# EAGLE board tappytap (EAGLE 7.3.0)
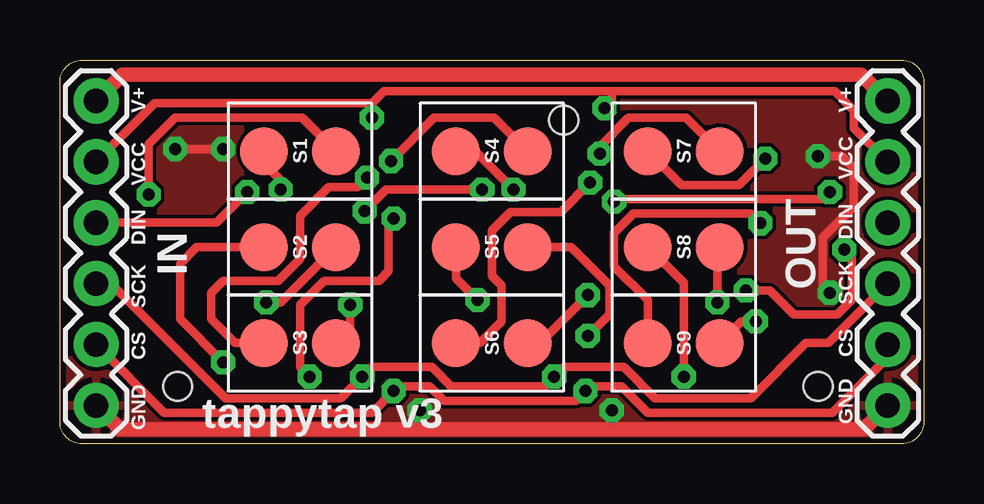
[diagram p0: board, top side]
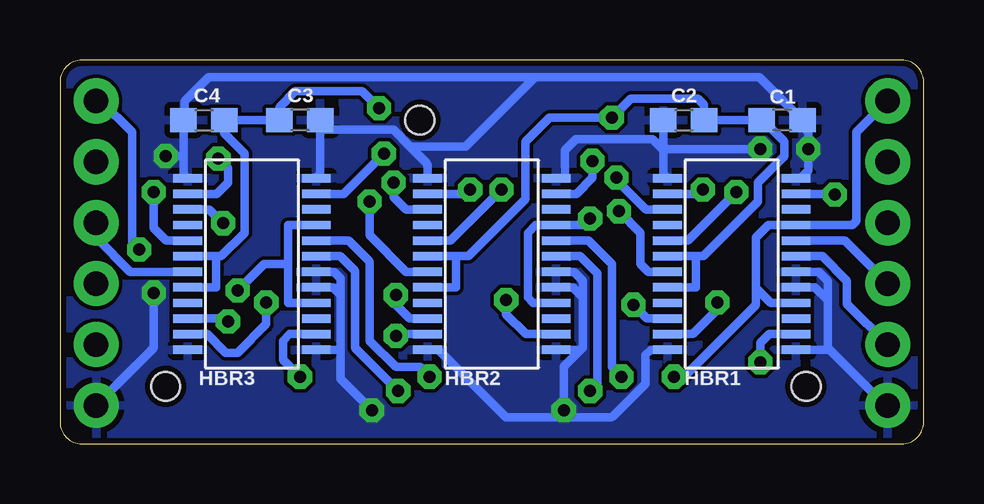
[diagram p1: board, bottom side, seen from below]

Size 36.01 x 16.01 mm. Coordinates in mm from the lower left corner, seen from the top.
Outline: 0,15 arc-100 1,16 35,16 arc-100 36,15 36,1 arc-100 35,0 1,0 arc-100 0,1 0,15
Copper layers (1*16): Top 0.035mm / dielectric 1.6mm / Bottom 0.035mm
Design rules "PCBWay": minimum track width 6mil, minimum drill 0.3mm, track to track 6mil, track to pad 6mil, pad to pad 6mil, via to via 6mil, smd to smd 6mil, copper to edge 10mil, drill to drill 8mil, minimum pad ring 12mil, minimum via ring 10mil, stop-mask expansion 4mil, vias tented up to drill 25mil, thermal gap 10mil
Holes 1.2 mm at 4.9,2.4 31.6,2.4 21,13.5

## Footprints (pad centres in the part's own frame; a part is rotated, then mirrored left to right if it is on the bottom)
C0603 = smd 1.1 x 1: 1 -0.85,0; 2 0.85,0
SSOP-24 = smd 1.2 x 0.35: 1 -2.68,3.575; 2 -2.68,2.925; 3 -2.68,2.275; 4 -2.68,1.625; 5 -2.68,0.975; 6 -2.68,0.325; 7 -2.68,-0.325; 8 -2.68,-0.975; 9 -2.68,-1.625; 10 -2.68,-2.275; 11 -2.68,-2.925; 12 -2.68,-3.575; 13 2.68,-3.575; 14 2.68,-2.925; 15 2.68,-2.275; 16 2.68,-1.625; 17 2.68,-0.975; 18 2.68,-0.325; 19 2.68,0.325; 20 2.68,0.975; 21 2.68,1.625; 22 2.68,2.275; 23 2.68,2.925; 24 2.68,3.575
1X06 = drill 1.016 pad 1.88: 1 0,0; 2 2.54,0; 3 5.08,0; 4 7.62,0; 5 10.16,0; 6 12.7,0
TP2_2MM = smd 2 x 2: P$1 -1.5,0; P$2 1.5,0

## Placement (x,y rotation side)
C1  10uF  [C0603]  5.9,13.5 0 bottom
C2  0.1uF  [C0603]  10,13.5 180 bottom
C3  10uF  [C0603]  26,13.5 0 bottom
C4  0.1uF  [C0603]  30,13.5 180 bottom
HBR1  NCV7718  [SSOP-24]  8,7.5 0 bottom
HBR2  NCV7718  [SSOP-24]  18,7.5 0 bottom
HBR3  NCV7718  [SSOP-24]  28,7.5 0 bottom
IN  [1X06]  1.5,1.6 90 top
OUT  [1X06]  34.5,1.6 90 top
S1  TP2  [TP2_2MM]  10,12.2 0 top
S2  TP2  [TP2_2MM]  10,8.2 0 top
S3  TP2  [TP2_2MM]  10,4.2 0 top
S4  TP2  [TP2_2MM]  18,12.2 0 top
S5  TP2  [TP2_2MM]  18,8.2 0 top
S6  TP2  [TP2_2MM]  18,4.2 0 top
S7  TP2  [TP2_2MM]  26,12.2 0 top
S8  TP2  [TP2_2MM]  26,8.2 0 top
S9  TP2  [TP2_2MM]  26,4.2 0 top

## Library data of the parts
C1-C4 = rcl
HBR1-HBR3 S1-S9 = Sparky
IN OUT = SparkFun-Connectors; PROD_ID: CONN-08437

## Nets
+5V [usbvcc]: C1.1 C2.1 C3.1 C4.1 HBR1.6 HBR1.8 HBR2.6 HBR2.8 HBR3.6 HBR3.8 IN.5 OUT.5
GND [gnd]: C1.2 C2.2 C3.2 C4.2 HBR1.1 HBR1.12 HBR1.13 HBR1.17 HBR1.18 HBR1.24 HBR2.1 HBR2.12 HBR2.13 HBR2.17 HBR2.18 HBR2.24 HBR3.1 HBR3.12 HBR3.13 HBR3.17 HBR3.18 HBR3.24 IN.1 OUT.1
N$24: HBR1.7 HBR2.5
N$26: HBR2.7 HBR3.5
NCV_CS: HBR1.19 HBR2.19 HBR3.19 IN.2 OUT.2
S1A: HBR1.2 S1.P$1
S1B: HBR1.23 S1.P$2
S2A: HBR1.14 S2.P$1
S2B: HBR1.11 S2.P$2
S3A: HBR1.3 S3.P$1
S3B: HBR1.10 S3.P$2
S4A: HBR2.2 S4.P$1
S4B: HBR2.23 S4.P$2
S5A: HBR2.14 S5.P$1
S5B: HBR2.11 S5.P$2
S6A: HBR2.3 S6.P$1
S6B: HBR2.10 S6.P$2
S7A: HBR3.2 S7.P$1
S7B: HBR3.23 S7.P$2
S8A: HBR3.14 S8.P$1
S8B: HBR3.11 S8.P$2
S9A: HBR3.3 S9.P$1
S9B: HBR3.10 S9.P$2
SCK: HBR1.20 HBR2.20 HBR3.20 IN.3 OUT.3
SI: HBR1.5 IN.4
SO: HBR3.7 OUT.4
V+: HBR1.16 HBR1.21 HBR2.16 HBR2.21 HBR3.16 HBR3.21 IN.6 OUT.6

## Tracks (layer width: path | path; a pad name or v marks a point on that pad's centre or on a via)
+5V  (via drill 0.5)
  Top 0.35: v13,13.6 13,14.2 | 13,14.2 3.94,14.2 IN.5 | OUT.5 33.1,13.16 33.1,13.9 32.3,14.7 23,14.7 | 13,14.2 13.5,14.7 23,14.7 | v22.7,14 23,14.3 23,14.7
  Bottom 0.35: 26.6,13.25 C3.1 | HBR1.6 9.5,7.83 | 9.5,7.83 9.18,7.83 6.9,10.1 6.9,10.9 5.8,12 5.8,12.6 6.65,13.45 6.7,13.45 C1.1 C2.1 9.15,14.15 9.4,14.4 12.2,14.4 v13,13.6 15.6,13.6 16.6,12.6 16.6,10.2 18.98,7.83 19.5,7.83 | HBR1.8 9.5,6.53 9.5,7.83 | HBR2.8 19.5,6.53 19.5,7.83 | 19.5,7.83 HBR2.6 | HBR3.6 29.5,7.83 | 29.5,7.83 29.5,6.53 HBR3.8 | 26.8,13.55 C3.1 | 29.5,7.83 29.28,7.83 28.3,8.8 28.3,12.1 29.15,12.95 C4.1 C3.1 | C3.1 26.85,14.05 26.2,14.7 23.4,14.7 v22.7,14
GND  (via drill 0.5)
  Top 0.35: v6.8,12.3 v4.8,12.3 | v15,1.4 15,0.6 | v23,1.4 23,0.6 | v32.1,6.3 31.8,6.6 31.8,8.6 33.1,9.9 33.1,11.5 32.6,12 v31.6,12
  Top 0.61: 34,1.1 OUT.1 33.5,0.6 23,0.6 15,0.6 2.5,0.6 IN.1
  Bottom 0.35: HBR1.13 4,3.93 4,4 | C2.2 10.85,12.5 | C3.2 25.15,13 | 24.3,3.93 HBR3.13 | HBR1.17 4.53,6.53 4,6 | HBR3.17 24.63,6.53 24.3,6.2 | 24.3,6.2 24.3,3.93 | 11,12.4 10.95,12.4 10.85,12.5 | 14.2,6.1 14.63,6.53 HBR2.17 | 14.2,6.1 14.2,4.03 14.3,3.93 | HBR2.13 14.3,3.93 | v15,1.4 14.7,1.1 17.4,1.1 20.23,3.93 HBR2.12 | 14.3,3.93 15,3.23 v15,1.4 | 24.3,3.93 24.3,2.7 v23,1.4 | 21.4,12.4 22.1,13.1 25.05,13.1 25.15,13 | 21.4,12.4 19.1,12.4 16.2,15.3 | HBR1.24 5.13,11.08 4.8,11.4 v4.8,12.3 4.8,13 5.2,13.4 | v6.8,12.3 10.9,12.3 11,12.4 | 5.05,13.65 C1.2 6.85,15.3 16.2,15.3 | 10.85,12.5 10.85,11.25 10.7,11.1 | 25.15,13 25.15,11.25 HBR3.24 | HBR1.12 11.38,3.93 11.6,3.7 11.6,2.5 12.93,1.18 arc45 13.11,1.1 14.6,1.1 arc45 14.77,1.17 v15,1.4 | 15.28,7.18 HBR2.18 14.58,7.18 14.2,6.8 14.2,6.1 | 30.85,12 C4.2 30.95,13.6 | 30.85,12 30.85,11.35 arc-45 30.78,11.17 HBR3.1 | HBR2.24 15.13,11.08 arc-45 14.95,11.15 14.95,12.25 14.5,12.7 11.3,12.7 11,12.4 | HBR2.1 20.68,11.58 arc-45 20.76,11.76 21.4,12.4 | HBR1.18 4.38,7.18 4,6.8 4,6 | HBR3.18 24.58,7.18 24.3,6.9 24.3,6.2 | IN.1 1.6,1.6 4,4 | 4,4 4,6 | 16.2,15.3 29.8,15.3 30.8,14.3 30.8,13.3 | OUT.1 32.1,4 v32.1,6.3 | v31.6,12 30.85,12
  pour Bottom: 0,15 arc-100 1,16 35,16 arc-100 36,15 36,1 arc-100 35,0 1,0 arc-100 0,1
  pour Top: 0,15 arc-100 1,16 35,16 arc-100 36,15 36,1 arc-100 35,0 1,0 arc-100 0,1
N$24  (via drill 0.5)
  Top 0.35: v12.7,9.7 13.6,10.6 v17.6,10.6
  Bottom 0.35: HBR1.7 11.48,7.18 11.8,7.5 11.8,8.8 v12.7,9.7 | HBR2.5 19.73,8.48 v17.6,10.6
N$26  (via drill 0.5)
  Top 0.35: v23.1,10.1 23.2,10.2 31.8,10.2 v32.1,10.5
  Bottom 0.35: HBR2.7 21.58,7.18 23.1,8.7 v23.1,10.1 | HBR3.5 31.58,8.48 32.1,9 v32.1,10.5
NCV_CS  (via drill 0.5)
  Top 0.35: OUT.2 34.5,3.6 32.2,1.3 24.5,1.3 23.4,2.4 22.1,2.4 v21.9,2.2 21.5,1.8 16,1.8 15.4,2.4 14.1,2.4 v13.9,2.2 13,1.3 4.34,1.3 IN.2
  Bottom 0.35: HBR2.19 14.33,7.83 13.6,7.1 13.6,2.5 v13.9,2.2 | v21.9,2.2 23.7,4 23.7,7.2 24.33,7.83 HBR3.19 | HBR1.19 4.23,7.83 3.2,6.8 3.2,5.84 IN.2
S1A  (via drill 0.5)
  Top 0.35: S1.P$1 8,12.2 9.2,11 v9.2,10.6
  Bottom 0.35: HBR1.2 9.38,10.43 v9.2,10.6
S1B  (via drill 0.5)
  Top 0.35: S1.P$2 10.1,13.6 4.8,13.6 3.7,12.5 v3.7,10.4
  Bottom 0.35: HBR1.23 3.73,10.43 v3.7,10.4
S2A  (via drill 0.5)
  Top 0.35: S2.P$1 5.7,8.2 5,7.5 5,5.2 v6.8,3.4
  Bottom 0.35: HBR1.14 6.43,4.58 6.8,4.2 v6.8,3.4
S2B  (via drill 0.5)
  Top 0.35: S2.P$2 9.2,5.9 v8.6,5.9
  Bottom 0.35: HBR1.11 9.63,4.58 8.6,5.6 v8.6,5.9
S3A  (via drill 0.5)
  Top 0.35: S3.P$1 7.3,4.2 6.3,5.2 6.3,6.3 6.8,6.8 9.1,6.8 10,7.7 10,9.5 11.2,10.7 12.4,10.7 v12.8,11.1
  Bottom 0.35: HBR1.3 11.58,9.78 12.8,11 v12.8,11.1
S3B  (via drill 0.5)
  Top 0.35: S3.P$2 12.1,4.8 v12.1,5.8
  Bottom 0.35: HBR1.10 11.53,5.23 v12.1,5.8
S4A  (via drill 0.5)
  Top 0.35: S4.P$1 17.3,12.2 v18.9,10.6
  Bottom 0.35: HBR2.2 19.08,10.43 v18.9,10.6
S4B  (via drill 0.5)
  Top 0.35: S4.P$2 18.1,13.6 15.6,13.6 v13.8,11.8
  Bottom 0.35: HBR2.23 14.48,10.43 13.8,11.1 v13.8,11.8
S5A  (via drill 0.5)
  Top 0.35: S5.P$1 16.5,6.9 v17.4,6
  Bottom 0.35: v17.4,6 17.4,5.4 16.58,4.58 HBR2.14
S5B  (via drill 0.5)
  Top 0.35: S5.P$2 21.3,8.2 22.9,6.6 22.9,5.4 v22,4.5
  Bottom 0.35: v22,4.5 21.93,4.58 HBR2.11
S6A  (via drill 0.5)
  Top 0.35: S6.P$1 17.5,4.2 18.4,5.1 18.4,6.6 18,7 18,8.9 18.78,9.68 20.88,9.68 v22.1,10.9
  Bottom 0.35: HBR2.3 21.58,9.78 22.1,10.3 v22.1,10.9
S6B  (via drill 0.5)
  Top 0.35: S6.P$2 20,4.2 v22,6.2
  Bottom 0.35: v22,6.2 22,5.8 21.43,5.23 HBR2.10
S7A  (via drill 0.5)
  Top 0.35: S7.P$1 25.9,10.8 28.3,10.8 v29.4,11.9
  Bottom 0.35: v29.4,11.9 29,11.5 29,10.9 29.48,10.43 HBR3.2
S7B  (via drill 0.5)
  Top 0.35: v22.5,12.1 22.5,12.4 23.7,13.6 26.1,13.6 S7.P$2
  Bottom 0.35: HBR3.23 24.18,10.43 v22.5,12.1
S8A  (via drill 0.5)
  Top 0.35: S8.P$1 26,6.7 v26,2.8
  Bottom 0.35: HBR3.14 26.43,4.58 26.7,4.3 26.7,3.5 v26,2.8
S8B  (via drill 0.5)
  Top 0.35: S8.P$2 27.4,8.1 v27.4,5.9
  Bottom 0.35: HBR3.11 29.88,4.58 29.1,3.8 28.6,3.8 27.4,5 v27.4,5.9
S9A  (via drill 0.5)
  Top 0.35: v29.2,9.2 28.8,9.6 23.9,9.6 23.1,8.8 23.1,7.4 24.5,6 S9.P$1
  Bottom 0.35: HBR3.3 29.78,9.78 v29.2,9.2
S9B  (via drill 0.5)
  Top 0.35: S9.P$2 28.4,5.1 v29,5.1
  Bottom 0.35: HBR3.10 29.13,5.23 v29,5.1
SCK  (via drill 0.5)
  Top 0.35: OUT.3 32.02,4.2 31.1,4.2 28.8,1.9 24.8,1.9 23.5,3.2 21,3.2 v20.6,2.8 20.2,2.4 16.3,2.4 15.5,3.2 13,3.2 v12.6,2.8 11.7,1.9 6.9,1.9 2.12,6.68 IN.3
  Bottom 0.35: v12.6,2.8 13,3.2 13,7.5 13.98,8.48 HBR2.20 | v20.6,2.8 21,3.2 22,3.2 23.1,4.3 23.1,7.6 23.98,8.48 HBR3.20 | HBR1.20 3.3,8.48 IN.3
SI  (via drill 0.5)
  Top 0.35: IN.4 6.52,9.22 v7.8,10.5
  Bottom 0.35: v7.8,10.5 9.83,8.48 HBR1.5
SO
  Bottom 0.35: HBR3.7 33.08,7.18 34.5,8.6 OUT.4
V+  (via drill 0.5)
  Top 0.35: v10.4,2.8 10,3.2 10,5.8 11,6.8 13.3,6.8 13.7,7.2 13.7,9.2 v13.9,9.4 | v28.6,6.4 29.6,6.4 30.6,5.4 32.4,5.4 33,6 33,7.8 v32.7,8.1
  Top 0.61: IN.6 2.6,15.4 33.4,15.4 OUT.6 33.6,15.2
  Bottom 0.35: 7,6.5 7,8.6 6.48,9.13 HBR1.21 2.98,9.13 2.8,9.3 2.8,13 IN.6 | 7,6.5 6.38,5.88 HBR1.16 | HBR2.16 16.28,5.88 16.5,6.1 16.5,8.8 16.18,9.13 HBR2.21 14.18,9.13 v13.9,9.4 | HBR3.16 26.5,5.88 26.5,7.51 | 7,6.5 7,5.8 10,2.8 v10.4,2.8 | 26.5,7.51 26.5,9.13 HBR3.21 | 26.5,7.51 27.5,7.51 v28.6,6.4 | OUT.6 34.3,14.3 33,13 33,8.4 v32.7,8.1

## Text on the board
tNames: V+ | V+ | VCC | VCC | DIN | DIN | SCK | SCK | CS | CS | GND | tappytap v3 | GND